# EAGLE board MINI_SAM_D51_007 (EAGLE 9.1.1)
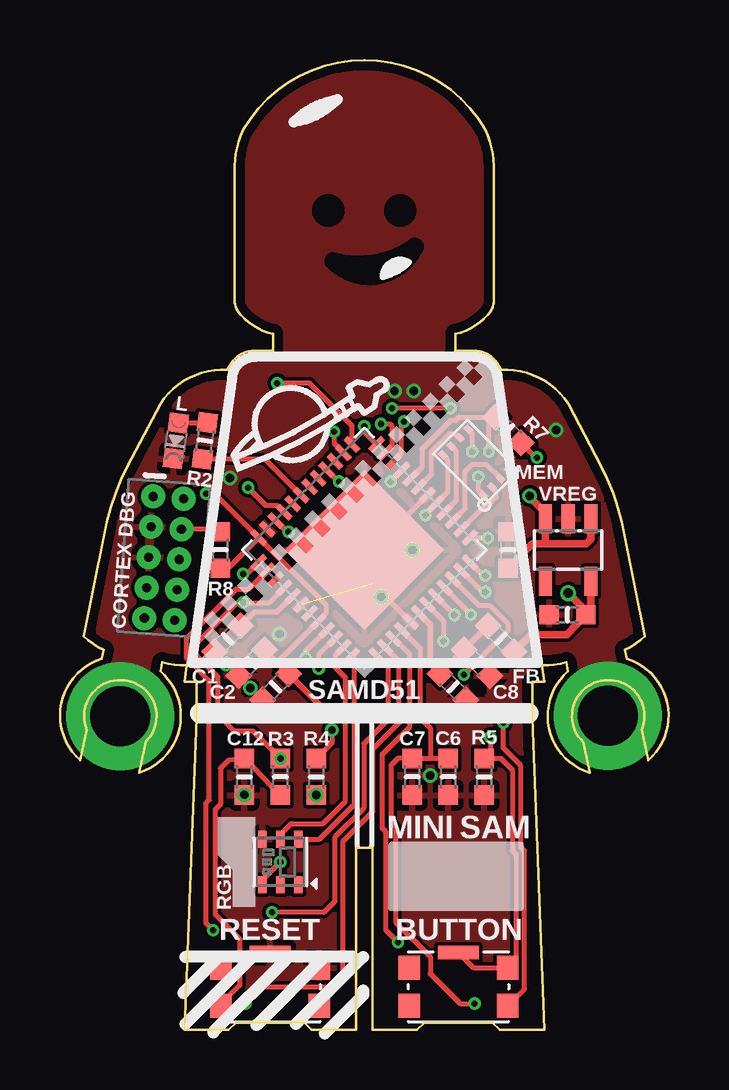
[diagram p0: board, top side]
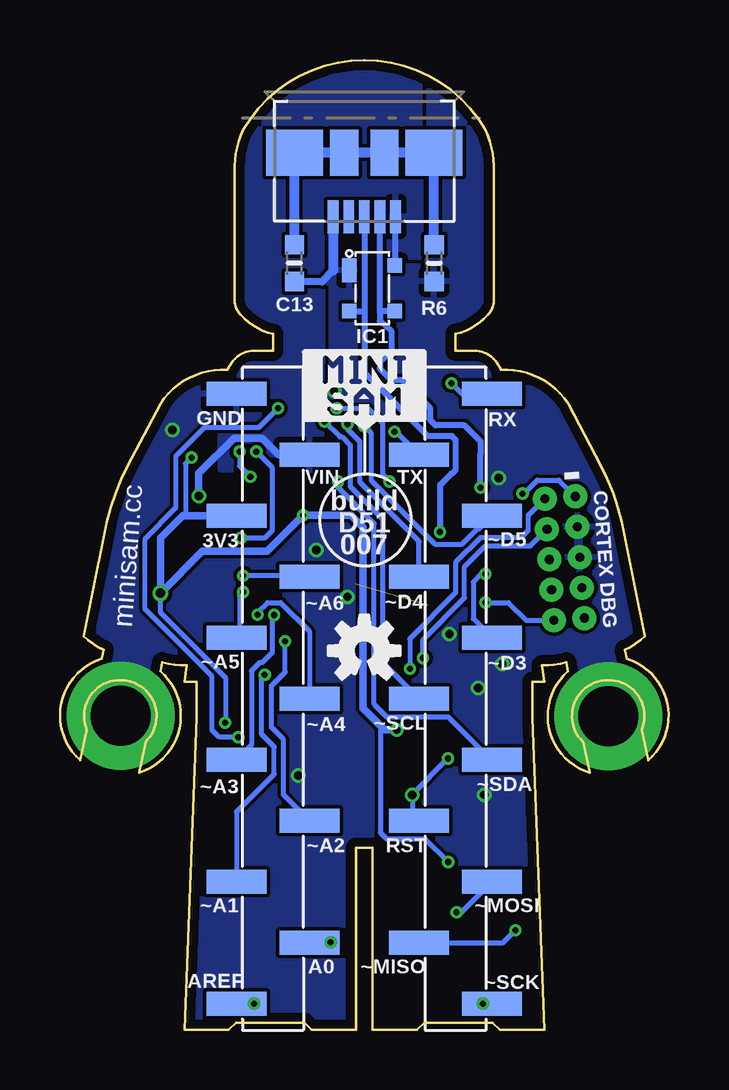
[diagram p1: board, bottom side, seen from below]

Size 25.38 x 40.42 mm. Coordinates in mm from the lower left corner, seen from the top.
Outline: 7.54,29.8 arc-40 7.29,30.3
Outline: 7.29,30.3 7.29,36
Outline: 18.09,30.3 18.09,36
Outline: 7.64,37.5 arc-120 17.74,37.5
Outline: 7.29,36 arc-25 7.64,37.5
Outline: 18.09,36 arc25 17.74,37.5
Outline: 7.54,29.8 arc35 8.89,29
Outline: 17.84,29.8 arc40 18.09,30.3
Outline: 17.84,29.8 arc-35 16.49,29
Outline: 8.01,28.3 arc63 6.99,27.5
Outline: 18.39,27.5 arc63 17.37,28.3
Outline: 6.99,27.5 arc60 4.19,26.1 2.82,23.5 arc18 1.83,20.54 0.99,16.4 arc15 1.82,15.83 1.75,15.46 arc122 0.85,11.24 1.12,12.52 arc-125 2.83,14.54 arc-125 3.56,12
Outline: 18.39,27.5 arc-60 21.19,26.1 22.55,23.5 arc-18 23.55,20.54 24.39,16.4 arc-15 23.55,15.83 23.63,15.46 arc-122 24.53,11.24 24.26,12.52 arc125 22.55,14.54 arc125 21.81,12 22.08,10.72 arc-122 21.19,14.95 21.11,15.31 arc-15 20.09,15.2 20.19,14.5 19.69,14.5 19.69,13 20.19,0 18.34,0 18.04,0.3 15.19,0.3 14.89,0 13.04,0 13.04,7.6 12.34,7.6 12.34,0 10.49,0 10.19,0.3 7.34,0.3 7.04,0 5.19,0 5.69,13 5.69,14.5 5.19,14.5 5.29,15.2 arc-15 4.27,15.31 4.19,14.95 arc-122 3.29,10.72
Outline: 3.56,12 3.29,10.72
Outline: 3.56,12 3.29,10.72
Outline: 8.01,28.3 8.69,28.3 8.89,28.3 8.89,29
Outline: 8.01,28.3 arc63 6.99,27.5
Outline: 18.39,27.5 arc63 17.37,28.3
Outline: 17.37,28.3 16.69,28.3 16.49,28.3 16.49,29
Outline: 7.54,29.8 arc-40 7.29,30.3
Outline: 7.29,30.3 7.29,36
Outline: 18.09,30.3 18.09,36
Outline: 7.64,37.5 arc-120 17.74,37.5
Outline: 7.29,36 arc-25 7.64,37.5
Outline: 18.09,36 arc25 17.74,37.5
Outline: 7.54,29.8 arc35 8.89,29
Outline: 17.84,29.8 arc40 18.09,30.3
Outline: 17.84,29.8 arc-35 16.49,29
Copper layers (1*16): Top 0.035559375mm / dielectric 1.6mm / Bottom 0.035559375mm
Design rules "oshpark-2layer-tented": minimum track width 6mil, minimum drill 10mil, track to track 6mil, track to pad 6mil, pad to pad 6mil, via to via 6mil, smd to smd 6mil, copper to edge 15mil, drill to drill 6mil, minimum pad ring 5mil, minimum via ring 5mil, stop-mask expansion 2.5mil, vias tented up to drill 20mil, thermal gap 10mil
tRestrict: area 11.1,31.2 to 15,32.9; area 10.9,33.9 to 11.5,34.4; area 13.9,33.9 to 14.5,34.4; 5 lines

## Footprints (pad centres in the part's own frame; a part is rotated, then mirrored left to right if it is on the bottom)
_0603MP = smd 0.8 x 0.8: 1 -0.762,0; 2 0.762,0
SOT143B_REFLOW = smd 1 x 0.6: P1 -0.75,-0.95 | smd 0.6 x 0.6: P2 0.95,-0.95; P$3 0.95,0.95; P$4 -0.95,0.95
MOLEX_47346-1001 = smd 0.45 x 1.38: P1 1.3,-2.66; P2 0.65,-2.66; P3 0,-2.66; P4 -0.65,-2.66; P5 -1.3,-2.66 | smd 2.375 x 1.9: PAD1 -2.913,0; PAD4 2.913,0 | smd 1.175 x 1.9: PAD2 -0.838,0; PAD3 0.838,0
2X5-PTH-1.27MM = drill 0.381 pad 1: 1 -2.54,-0.635; 2 -2.54,0.635; 3 -1.27,-0.635; 4 -1.27,0.635; 5 0,-0.635; 6 0,0.635; 7 1.27,-0.635; 8 1.27,0.635; 9 2.54,-0.635; 10 2.54,0.635
1X11_SMT = smd 1 x 2.5: 1 -12.7,1.52; 2 -10.16,-1.52; 3 -7.62,1.52; 4 -5.08,-1.52; 5 -2.54,1.52; 6 0,-1.52; 7 2.54,1.52; 8 5.08,-1.52; 9 7.62,1.52; 10 10.16,-1.52; 11 12.7,1.52
CHIPLED_0603_NOOUTLINE = smd 0.8 x 0.8: A 0,-0.75; C 0,0.75
APA102_2020 = smd 0.7 x 0.35: 1 -0.95,-0.75; 2 -0.95,0; 3 -0.95,0.75; 4 0.95,0.75; 5 0.95,0; 6 0.95,-0.75
KMS_SWITCH = smd 0.9 x 1: 1 -2.05,-0.8; 2 -2.05,0.8; 4 2.05,0.8; 5 2.05,-0.8 | smd 1.7 x 0.55: 3 0,1.425
TQFN48_7MM = smd 0.25 x 0.75: 1 -2.75,-3.475; 2 -2.25,-3.475; 3 -1.75,-3.475; 4 -1.25,-3.475; 5 -0.75,-3.475; 6 -0.25,-3.475; 7 0.25,-3.475; 8 0.75,-3.475; 9 1.25,-3.475; 10 1.75,-3.475; 11 2.25,-3.475; 12 2.75,-3.475; 25 2.75,3.475; 26 2.25,3.475; 27 1.75,3.475; 28 1.25,3.475; 29 0.75,3.475; 30 0.25,3.475; 31 -0.25,3.475; 32 -0.75,3.475; 33 -1.25,3.475; 34 -1.75,3.475; 35 -2.25,3.475; 36 -2.75,3.475 | smd 0.75 x 0.25: 13 3.475,-2.75; 14 3.475,-2.25; 15 3.475,-1.75; 16 3.475,-1.25; 17 3.475,-0.75; 18 3.475,-0.25; 19 3.475,0.25; 20 3.475,0.75; 21 3.475,1.25; 22 3.475,1.75; 23 3.475,2.25; 24 3.475,2.75; 37 -3.475,2.75; 38 -3.475,2.25; 39 -3.475,1.75; 40 -3.475,1.25; 41 -3.475,0.75; 42 -3.475,0.25; 43 -3.475,-0.25; 44 -3.475,-0.75; 45 -3.475,-1.25; 46 -3.475,-1.75; 47 -3.475,-2.25; 48 -3.475,-2.75 | smd 4.7 x 4.7: THERMAL 0,0
USON8 = smd 0.35 x 0.25: 1 -1.2,0.75; 2 -1.2,0.25; 3 -1.2,-0.25; 4 -1.2,-0.75; 5 1.2,-0.75; 6 1.2,-0.25; 7 1.2,0.25; 8 1.2,0.75
SOT23-5 = smd 0.55 x 1.2: 1 -0.95,-1.3; 2 0,-1.3; 3 0.95,-1.3; 4 0.95,1.3; 5 -0.95,1.3

## Placement (x,y rotation side)
C1  0.1µF  [_0603MP]  6.99,16.3 225 top
C2  10µF  [_0603MP]  7.99,15.3 225 top
C3  0.1µF  [_0603MP]  8.99,14.3 225 top
C6  4.7µF  [_0603MP]  16.19,10.55 270 top
C7  0.1µF  [_0603MP]  14.69,10.55 270 top
C8  0.1µF  [_0603MP]  17.39,15.3 315 top
C9  10µF  [_0603MP]  16.39,14.3 315 top
C10  10µF  [_0603MP]  18.69,20 270 top
C11  10µF  [_0603MP]  21.16,17.3 180 top
C12  0.1µF  [_0603MP]  7.69,10.55 90 top
C13  4.7nF  [_0603MP]  15.6,31.95 270 bottom
FB  [_0603MP]  18.39,16.3 135 top
IC1  PRTR5V0U2X  [SOT143B_REFLOW]  12.36,30.9 270 bottom
J1  MOLEX_47346-100147346  [MOLEX_47346-1001]  12.69,36.55 0 bottom
J2  CORTEX_DEBUG_PTH  [2X5-PTH-1.27MM]  4.34,19.65 265.8 top
J3  [1X11_SMT]  16.5,13.8 90 bottom
J4  [1X11_SMT]  8.88,13.8 270 bottom
L  [CHIPLED_0603_NOOUTLINE]  4.84,24.55 172 top
R2  1k  [_0603MP]  6.04,24.55 262 top
R3  330Ohm  [_0603MP]  9.19,10.55 270 top
R4  10K  [_0603MP]  10.69,10.55 90 top
R5  10K  [_0603MP]  17.69,10.55 90 top
R6  1M  [_0603MP]  9.78,31.95 90 bottom
R7  100k  [_0603MP]  18.69,25 135 top
R8  1k  [_0603MP]  6.69,20 270 top
RGB  AP102-2020  [APA102_2020]  9.19,7 90 top
SW1  KMS233GLFG  [KMS_SWITCH]  8.76,1.8 0 top
SW2  KMS233GLFG  [KMS_SWITCH]  16.61,1.8 0 top
U1  ATSAMD51G_TQFN48  [TQFN48_7MM]  12.69,20 45 top
U2  GD25x16  [USON8]  17.34,23.65 135 top
U$3  [OSHW-LOGO-S]  12.69,15.8 0 bottom
VREG  AP2112K-3.3V  [SOT23-5]  21.19,20 180 top

## Library data of the parts
C1-C3 C6-C13 FB L R2-R8 RGB U1 U2 = microbuilder
IC1 J1 SW1 SW2 = Shockley_Custom
J2 = SparkFun-Connectors
J3 J4 = pinhead+
U$3 = SparkFun-Aesthetics
VREG = SparkFun-PowerIC; PROD_ID: VREG-12457

## Nets
!RESET: J2.10 J4.8 R3.1 R4.1 U1.40
A0: J3.2 U1.3
A1: J3.3 U1.10
A2: J3.4 U1.7
A3: J3.5 U1.8
A4: J3.6 U1.9
A5: J3.7 U1.11
A6_D2: J3.8 U1.12
AREF: C6.1 C7.1 J3.1 U1.4
D3: J4.5 U1.37
D4: J4.4 U1.23
D5: J4.3 U1.24
D9: R5.2 SW2.3 SW2.4 U1.28
D10: U1.29
D11: U1.30
D12: U1.32
D13: R2.2 U1.31
DOTSTAR_CLK: RGB.5 U1.47
DOTSTAR_DATA: RGB.6 U1.48
GND: C1.2 C2.2 C3.2 C6.2 C7.2 C8.2 C9.2 C10.1 C11.2 C12.1 C13.2 IC1.P1 J1.P5 J2.3 J2.5 J3.11 L.C R5.1 R6.1 RGB.4 SW1.3 SW1.4 U1.5 U1.18 U1.35 U1.42 U1.THERMAL U2.4 VREG.2
MISO: J4.10 U1.38
MOSI: J4.9 U1.1
N$2: C13.1 J1.PAD1 J1.PAD2 J1.PAD3 J1.PAD4 R6.2
N$3: L.A R2.1
N$4: C12.2 R3.2 SW1.1
N$9: C1.1 U1.41
QSPI_CS: R7.2 U1.20 U2.1
QSPI_DATA[0]: U1.13 U2.5
QSPI_DATA[1]: U1.14 U2.2
QSPI_DATA[2]: U1.15 U2.3
QSPI_DATA[3]: U1.16 U2.7
QSPI_SCK: U1.19 U2.6
RX_D0: J4.1 U1.25
SCK: J4.11 U1.2
SCL: J4.6 U1.22
SDA: J4.7 U1.21
SWCLK: J2.4 R8.1 U1.45
SWDIO: J2.2 U1.46
TX_D1: J4.2 U1.26
USBD+ [USB_DATA]: IC1.P2 J1.P3 U1.34
USBD- [USB_DATA]: IC1.P$3 J1.P2 U1.33
VDD: C2.1 C3.1 C11.1 FB.1 J2.1 J3.9 R4.2 R7.1 R8.2 RGB.3 SW2.5 U1.17 U1.36 U1.44 U2.8 VREG.5
VDDANA: C8.1 C9.1 FB.2 U1.6
VIN: C10.2 IC1.P$4 J1.P1 J3.10 VREG.1 VREG.3
VSW: U1.43

## Tracks (layer width: path | path; a pad name or v marks a point on that pad's centre or on a via)
!RESET  (via drill 0.25, 0.35)
  Top 0.203: U1.40 8.73,17.81 v7.64,17.81 7.39,17.81 5.63,16.05 5.63,15.66 6.59,14.7 6.59,13.15 7.29,12.45 8.05,12.45 R3.1 v9.2,11.31
  Bottom 0.203: v7.64,17.81 6.67,17.81 5.93,17.07 J2.10 | J4.8 10.69,9.01 R4.1 10.69,9.82 v9.2,11.31
  other vias: 10.69,9.79
A0  (via drill 0.25)
  Top 0.203: U1.3 14.59,15.62 14.59,12.63 13.44,11.48 13.44,8.4 13.59,8.25 13.59,4.15 v14.09,3.65
  Bottom 0.203: v14.09,3.65 J3.2
A1  (via drill 0.25)
  Top 0.203: v16.84,14.8 18.67,16.63 18.67,16.94 17.92,17.69 17.48,17.69 17.22,17.95 17.21,17.95 U1.10
  Bottom 0.203: J3.3 18.02,9.09 16.44,10.66 16.44,11.8 16.99,12.35 16.99,14.65 v16.84,14.8
A2  (via drill 0.25)
  Top 0.203: U1.7 15.99,17.05 v15.99,16.2
  Bottom 0.203: v15.99,16.2 15.99,14.91 16.56,14.35 16.56,12.61 16.06,12.11 16.06,9.8 J3.4
A3  (via drill 0.25)
  Top 0.203: v16.45,17.29 U1.8
  Bottom 0.203: J3.5 17.4,11.88 17.4,14.96 17.05,15.31 16.94,15.31 16.51,15.73 16.51,17.22 16.49,17.25 v16.45,17.29
A4  (via drill 0.25)
  Top 0.203: U1.9 17.14,17.32 v17.14,17.3
  Bottom 0.203: J3.6 14.98,16.61 16.18,17.81 16.73,17.81 17.14,17.4 v17.14,17.3
A5  (via drill 0.25)
  Top 0.203: U1.11 17.62,18.25 v17.74,18.25
  Bottom 0.203: J3.7 17.9,16.46 17.9,18.09 v17.74,18.25
A6_D2  (via drill 0.25)
  Top 0.203: U1.12 17.65,18.93 v17.74,18.93
  Bottom 0.203: v17.74,18.93 15.03,18.93 J3.8
AREF  (via drill 0.25)
  Top 0.203: U1.4 15.02,15.9 15.02,13 15.44,12.58 15.44,11.31 | v17.29,1.1 16.69,1.1 15.44,2.35 15.44,3.04 14,4.49 14,8.46 13.81,8.65 13.81,11.03 14.09,11.31 C7.1 15.19,11.31 15.24,11.31 15.44,11.31 | 15.44,11.31 C6.1
  Bottom 0.203: J3.1 v17.29,1.1
D3  (via drill 0.25)
  Top 0.203: v7.64,19 7.8,19 U1.37
  Bottom 0.203: J4.5 8.15,17.13 8.15,18.67 7.82,19 v7.64,19
D4  (via drill 0.25)
  Top 0.203: U1.23 13.84,24.33 13.84,25.18 13.77,25.25 v13.38,25.25
  Bottom 0.203: J4.4 10.4,20.36 12.86,22.82 12.87,22.83 12.87,24.51 13.38,25.03 v13.38,25.25
D5  (via drill 0.25)
  Top 0.203: U1.24 12.69,24.91 v12.69,25.15
  Bottom 0.203: J4.3 7.89,20.88 7.98,20.88 8.62,20.24 9.75,20.24 12.39,22.89 12.39,24.86 v12.69,25.15
D9  (via drill 0.25)
  Top 0.203: U1.28 11.61,22.85 v11.64,22.85 | v13.84,25.9 15.59,25.9 v16.29,25.9 | SW2.3 17.24,2.6 SW2.4 19.01,2.95 19.01,7.32 18.86,7.47 18.86,10.84 18.39,11.31 R5.2 17.94,11.56 v17.94,12.2
  Bottom 0.203: v11.64,22.85 11.94,23.15 11.94,25.3 12.54,25.9 v13.84,25.9 | v17.94,12.2 18.74,12.2 19.03,12.5 19.03,14.74 21.82,17.52 21.82,20.48 20.55,21.75 20.55,23.91 19.36,25.1 17.09,25.1 v16.29,25.9
D13
  Top 0.203: R2.2 8.54,23.8 U1.31
DOTSTAR_CLK
  Top 0.203: RGB.5 9.19,8.13 9.36,8.32 9.64,8.6 10.97,8.6 11.89,9.51 11.89,14.7 11.49,15.1 11.49,15.62 U1.47
DOTSTAR_DATA
  Top 0.203: RGB.6 10.83,7.95 12.28,9.4 12.28,15.5 U1.48
GND  (via drill 0.35, 2.5 pad 4.5)  (1 unrouted)
  Top 0.203: U1.5 13.04,18.59 13.04,20 | U1.18 13.04,20 | 13.04,20 U1.THERMAL v14.69,20
  Bottom 0.305: C13.2 14.45,31.18 13.99,31.65 | v14.75,26.63 v13.95,26.63
  Bottom 0.406: J1.P5 13.99,31.65
  other vias: 2.52,13.08 22.85,13.09 6.94,15.25 7.69,9.8 20.69,25 7.09,23 7.94,14.25 13.39,18.05 9.14,16.5 15.44,10.6
  pour Top: 5.19,0 20.19,0 20.19,12 21.69,12 21.69,14 22.69,14 22.69,12 24.69,12 24.69,42 0.69,42 0.69,12 2.69,12 2.69,14 3.69,14 3.69,12 5.19,12
  pour Bottom (rank 2): 10.39,42 10.39,32 14.19,32 14.19,27.35 24.69,27.35 24.69,12 20.19,12 20.19,0 5.19,0 5.19,12 3.69,12 3.69,14 2.69,14 2.69,12 0.69,12 0.69,42
MISO  (via drill 0.25)
  Top 0.203: U1.38 7.87,18.37 7.34,18.37 5.33,16.36 | v6.39,4.15 6.09,4.45 6.09,9.45 6.22,9.59 6.22,14.56 5.27,15.51 5.27,16.3 | 5.27,16.3 5.33,16.36 | 5.27,16.3 5.33,16.36
  Bottom 0.203: J4.10 6.9,3.64 v6.39,4.15
MOSI  (via drill 0.25)
  Top 0.203: U1.1 13.69,15.11 13.69,12.95 12.67,11.93 12.67,9.24 11.45,8.03 11.45,5.35 11,4.9 v8.84,4.9
  Bottom 0.203: J4.9 8.64,4.9 v8.84,4.9
N$2
  Bottom 0.406: R6.2 J1.PAD4 J1.PAD3 J1.PAD2 J1.PAD1 C13.1
N$3
  Top 0.203: L.A R2.1
N$4
  Top 0.203: SW1.1 6.71,1.08 7.49,1.85 7.49,3.79 6.49,4.8 6.49,9.2 6.69,9.4 6.69,10.9 7.02,11.23 C12.2 9.19,9.73 R3.2
N$9
  Top 0.203: U1.41 9.03,17.4 8.09,17.4 C1.1
QSPI_CS  (via drill 0.25)
  Top 0.203: U1.20 15.09,23.45 15.09,24.21 16.27,25.39 16.5,25.39 16.65,25.54 R7.2 17.89,25.28 v17.89,24.1 | U2.1 17.44,22.49 v17.44,23.05
  Bottom 0.203: v17.89,24.1 17.89,23.5 v17.44,23.05
QSPI_DATA[0]  (via drill 0.25)
  Top 0.203: U1.13 17.1,20.5 v17.84,20.5 | v17.19,24.1 17.19,24.86 U2.5
  Bottom 0.203: v17.84,20.5 16.83,20.5 16.51,20.82 16.51,23.43 v17.19,24.1
QSPI_DATA[1]
  Top 0.203: U1.14 17.67,21.8 17.69,21.8 17.8,21.8 18.19,22.19 18.19,22.45 U2.2
QSPI_DATA[2]
  Top 0.203: U1.15 16.89,21.73 16.89,23.27 17.18,23.56 17.78,23.56 U2.3
QSPI_DATA[3]
  Top 0.203: U1.16 16.53,22.07 16.53,24.11 U2.7
QSPI_SCK
  Top 0.203: U1.19 15.49,23.16 15.49,24.11 16.24,24.85 16.49,24.85 U2.6
RX_D0  (via drill 0.25)
  Top 0.203: U1.25 12.18,25.18 10.41,26.95 v9.06,26.95
  Bottom 0.203: v9.06,26.95 8.61,26.5 J4.1
SCK  (via drill 0.25)
  Top 0.203: U1.2 14.14,15.37 14.14,12.8 13.05,11.71 13.05,9.11 11.81,7.87 11.81,2.17 11.44,1.8 8.44,1.8 v7.74,1.1
  Bottom 0.203: J4.11 v7.74,1.1
SCL  (via drill 0.25)
  Top 0.203: U1.22 14.24,24.02 14.24,25.25 v14.34,25.35
  Bottom 0.203: 13.62,24.71 13.69,24.71 | J4.6 11.93,15.33 11.93,21.3 13.28,22.65 13.28,24.37 13.62,24.71 | 13.69,24.71 13.62,24.71 | 13.69,24.71 13.7,24.71 v14.34,25.35
SDA  (via drill 0.25)
  Top 0.203: v13.79,22.85 13.79,22.87 U1.21
  Bottom 0.203: v13.79,22.85 13.79,22.6 12.28,21.1 12.28,13.57 11.75,13.05 9.19,13.05 7.41,11.26 J4.7
SWCLK  (via drill 0.25)
  Top 0.203: U1.45 10.24,15.78 v10.24,15.5 | R8.1 6.58,20.87 J2.4
  Bottom 0.203: v10.24,15.5 10.24,16.27 8.5,18.01 8.5,19.3 7.65,20.16 5.78,20.16 J2.4
SWDIO  (via drill 0.25)
  Top 0.203: U1.46 10.79,15.62 v10.79,15.05
  Bottom 0.203: 6.14,20.53 7.83,20.53 8.88,19.48 8.88,18.21 10.79,16.3 v10.79,15.05 | J2.2 5.85,21.44 5.85,20.82 6.14,20.53 | 6.14,20.53
TX_D1  (via drill 0.25)
  Top 0.203: U1.26 11.43,24.44 v11.43,24.93
  Bottom 0.203: v11.43,24.93 11.37,24.93 J4.2
USBD+  (via drill 0.25)
  Top 0.254: U1.34 9.46,20.75 v9.54,20.75
  Bottom 0.254: J1.P3 12.69,30 | IC1.P2 12.74,29.95 12.69,30 | v9.54,20.75 9.52,20.77 9.52,22.72 9.06,23.18 9.03,23.18 8.87,23.34 8.87,24.58 9.03,24.74 10.04,24.74 12.69,27.39 12.69,30
USBD-  (via drill 0.25)
  Top 0.203: U1.33 9.07,21.85 8.59,21.85 v7.84,22.6
  Bottom 0.254: J1.P2 12.04,30 11.99,29.95 | IC1.P$3 11.99,29.95 | 11.99,29.95 12.04,29.92 12.04,29.55 11.56,29.12 11.56,28.28 12.04,27.85 12.04,27.56 11.56,27.07 11.11,27.07 9.94,25.9 9.94,25.41 9.72,25.19 8.5,25.19 7.84,24.53 7.84,24 7.84,22.62 v7.84,22.6
VDD  (via drill 0.25, 0.3, 0.4)
  Top 0.203: U1.36 11.09,17.71 11.09,17.35 10.76,17.02 U1.44 9.1,15.35 | R8.2 6.97,19.19 U1.36 | v19.89,23.85 19.84,23.85 R7.1 | SW2.5 19.37,1.7 19.37,7.47 19.22,7.62 19.22,11.02 18.49,11.75 v18.49,12.8 | v9.19,7 8.44,6.25 RGB.3 | v11.34,12.5 11.34,11.96 R4.2 | U1.17 16.17,22.42 16.17,23.76 U2.8 | U1.36 6.45,22.35 v6.09,22.35
  Top 0.254: U1.17 15.24,21.49 v15.24,21.45 | 9.04,15.35 9.02,15.35 C2.1 | 9.04,15.35 9.04,15.33 C3.1 11.34,13.03 v11.34,12.5 | 9.04,15.35 9.1,15.35
  Top 0.305: C11.1 21.14,16.46 19.63,16.46 FB.1 | VREG.5 22.14,17.42 C11.1 | v21.19,18.2 21.92,17.47 C11.1
  Bottom 0.203: v21.19,18.2 21.19,17.39 18.48,14.68 v18.48,12.81 v18.49,12.8 | 20.27,21.42 20.14,21.54 20.14,23.59 v19.89,23.85 | v9.19,7 10.15,7.97 11.75,7.97 12.01,8.23 12.01,12.68 | v6.09,22.35 6.04,22.35 5.48,22.91 4.57,22.91 J2.1
  Bottom 0.305: v11.34,12.5 11.84,12.5 12.01,12.68 12.74,13.4 12.74,20.95 13.24,21.45 v15.24,21.45 16.75,19.94 19.45,19.94 v21.19,18.2 21.19,20.5 20.27,21.42 J3.9
VDDANA
  Top 0.254: FB.2 C8.1 C9.1 15.44,15.25 15.44,16.9 15.43,16.9 U1.6
VIN  (via drill 0.35)
  Top 0.305: VREG.1 22.14,20.45 21.94,20.25 20.24,20.25 | C10.2 19.7,20.25 20.24,20.25 | 20.24,20.25 VREG.3 20.24,21.55 19.59,22.2 v19.59,22.25
  Bottom 0.254: J1.P1 11.41,33.87 IC1.P$4
  Bottom 0.305: J3.10 16.26,23.96 16.96,24.66 18.12,24.66 19.59,23.19 v19.59,22.25
  pour Bottom: 10.4,42 10.34,32.2 14.44,32.2 14.49,23.35 18.69,23.35 18.69,42

## Text on the board
tPlace: CORTEX DBG
bPlace: - | CORTEX DBG
tNames: R2 | MEM | SAMD51 | MINI | SAM | RESET | BUTTON
bNames: RX | GND | TX | VIN | ~D5 | build / D51 / 007 | 3V3 | minisam.cc | ~D4 | ~A6 | ~D3 | ~A5 | ~SCL | ~A4 | ~SDA | ~A3 | RST | ~A2 | ~MOSI | ~A1 | ~SCK | ~MISO | A0 | AREF
tStop: STATUS | D51 / build / 007 / 2018
_tNames: L | L | RGB | RGB | IC1 | IC1 | C1 | C1 | FB1 | FB1 | C10 | C11 | C2 | C2 | C3 | C3 | C8 | C8 | C9 | C9 | C6 | C6 | R5 | R5 | C7 | C7 | R3 | R3 | R4 | R4 | C12 | C12
_bNames: IC2 | IC2 | R6 | R6 | C13 | C13 | JP1 | JP1